# Altium PCB Break Board_Rev02.PcbDoc
Units mil, origin at the board's own origin, x right, y up, seen from the top; angles counter-clockwise.
Board outline 545 x 629.92 mil, 2 copper layers (Top Layer, Bottom Layer); 6 components, 5 nets, 24 pads, 22 vias.
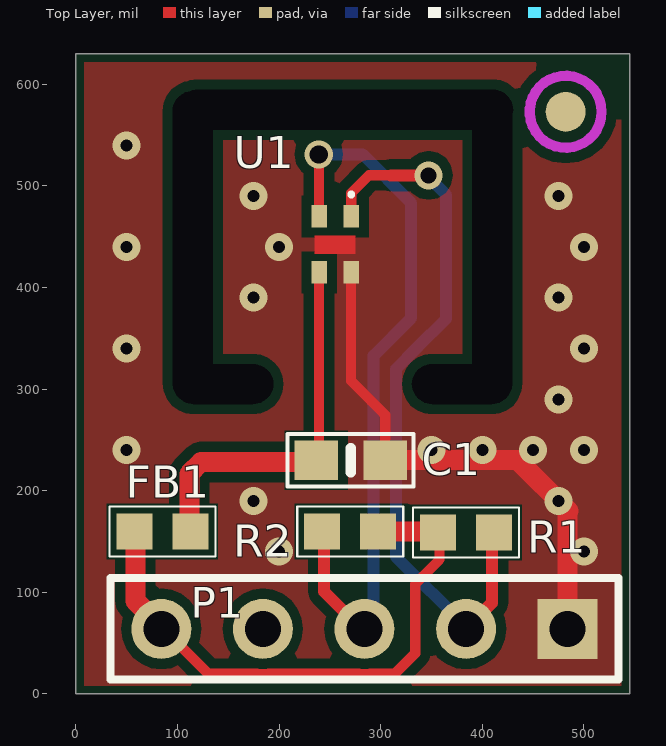
[diagram p0: Top Layer view]
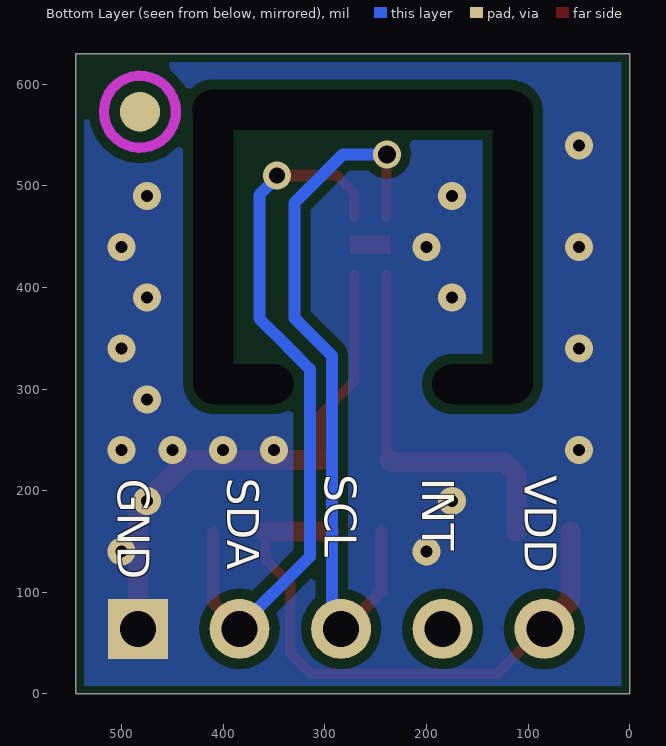
[diagram p1: Bottom Layer view, seen from below]

## Layer stack, top to bottom
Top Solder: solder mask 0.4, Solder Resist, Dk 3.5
Top Layer: signal copper 1.4
Dielectric 1: dielectric 12.6, FR-4, Dk 4.8
Bottom Layer: signal copper 1.4
Bottom Solder: solder mask 0.4, Solder Resist, Dk 3.5

## Board outline
0,0 0,629.92 545,629.92 545,0

## Design rules (kind name [scope] priority, off if disabled: settings)
BoardOutlineClearance [All] p1: gap=8 ignorepadtopadclearanceinfootprint=FALSE except(0: Arc-SplitContinuation Track-SplitContinuation SMDPad-SplitContinuation THPad-SplitContinuation Via-SplitContinuation Fill-SplitContinuation Poly-SplitContinuation Region-SplitContinuation Text-SplitContinuation)
Clearance [All] p1: gap=10 ignorepadtopadclearanceinfootprint=FALSE except(0: Arc-Hole Track-Hole SMDPad-Hole THPad-Hole Via-Hole Fill-Hole Poly-Hole Region-Hole Text-Hole)
PolygonConnect [All] p1: connectstyle=Direct reliefconductorwidth=10 reliefentries=4 polygonreliefangle="90 Angle" airgapwidth=10
RoutingVias [All] p1: holewidth=28 width=50 viastyle="Through Hole" minholewidth=28 minwidth=50 maxholewidth=28 maxwidth=50
SolderMaskExpansion [All] p1: expansion=4 istentingtop=FALSE
Width [All] p1: maxlimit=39.37 minlimit=10 preferedwidth=10
30 further rules are at their usual default settings.

## Classes and differential pairs
component class "Break Board_Rev02": C1 FB1 R1 R2 U1

## Components (designator, comment, footprint, x,y, rotation, side; value= is the part's Value field where it differs from the comment)
C1 "0.1uF" "0603 Capacitor" 270.47,230 r0 top
FB1 "FB 1uH" R0603 85,160 r180 top
P1 "Header 5" HDR1X5 484,64 r180 top
R1 "4.7K" R0603 384,159 r180 top
R2 "4.7K" R0603 270,160 r0 top
U1 "SHT41-AD1B-R3" SHT41AD1BR3 255.25,442.44 r270 top

## Footprints (in the part's own frame and the unit in brackets; to place one, negate y for a bottom-side part, rotate by r counter-clockwise, add the part's x,y. Pads: shape width x height; smd on the part's side, far side on the other; paste and mask are expansions set on the pad)
"0603 Capacitor" [mil]
  rect 43x39 smd: 1(-34,0) 2(34,0)
  silkscreen extent -62,-26 62,26, body extent -31,-16 32,16, height 32
HDR1X5 [mm] "Connector; Header; 5 Position"
  rect 1.5x1.5 hole 0.9: 1(0,0)
  round 1.5 hole 0.9: 2(2.54,0) 3(5.08,0) 4(7.62,0) 5(10.16,0)
  silkscreen extent -1.27,-1.27 11.43,1.27
R0603 [mm] "R0603"
  rect 0.9x0.9 smd: 1(-0.7,0) 2(0.7,0)
  silkscreen extent -1.33,-0.63 1.33,0.63, body extent -0.85,-0.4 0.85,0.4, height 0.56
SHT41AD1BR3 [mil]
  rect 22x15 smd: 1(-27.56,15.75) 2(-27.56,-15.75) 3(27.56,-15.75) 4(27.56,15.75)
  silkscreen extent -51,14 -47,18, body extent -30,-30 30,30, height 27

## Part data
C1: library part CAP, Part Number=1276-1011-2-ND
FB1: library part INDUCTOR, "FILTER CHIP 120 OHM 3A 0603", Distributor Part Number=MMZ2012Y152B, PACKAGE=0603, Part Number=490-3996-1-ND, Manufacturer Part Number=MMZ2012Y152B, Type=Ferrite
P1: "Header, 5-Pin", LatestRevisionDate=17-Jul-2002, LatestRevisionNote="Re-released for DXP Platform.", Publisher="Altium Limited"
R1 R2: library part R, PACKAGE=0603, Part Number=P4.7KDBTR-ND, Type=Resistor
U1: "Integrated Circuit", Manufacturer_Name=Sensirion, Mouser Part Number=403-SHT41-AD1B-R3, Arrow Part Number=SHT41-AD1B-R3, Arrow Price/Stock=https://www.arrow.com/en/products/sht41-ad1b-r3/sensirion-ag?region=nac, Datasheet Link=https://www.mouser.fr/datasheet/2/682/Sensirion_Humidity_Sensors_SHT4x_Datasheet-2001050.pdf, Height=0.59mm, Manufacturer_Part_Number=SHT41-AD1B-R3, Mouser Price/Stock=https://www.mouser.co.uk/ProductDetail/Sensirion/SHT41-AD1B-R3?qs=XAiT9M5g4x9TCtE5W6N3dA%3D%3D

## Free pads (board coordinates)
  rect 0x0 hole 39.37 slot 307.09 at 90 deg unplated: 24(115,440) 24(410,440)
  rect 0x0 hole 39.37 slot 98.43 at 0 deg unplated: 24(145,305) 24(380,305)
  rect 0x0 hole 39.37 slot 330.71 at 0 deg unplated: 24(265,575)
  round 39.37 smd: 24(482,573)
  round 39.37 smd far side: 24(482,573)

## Via types
v1: diameter 27.56, hole 11.81, Top Layer to Bottom Layer, tented both sides, 20 vias
v2: diameter 27.6, hole 17.75, Top Layer to Bottom Layer, tented both sides, 1 vias
v3: diameter 27.56, hole 15.75, Top Layer to Bottom Layer, tented both sides, 1 vias

## Nets (pads, with @x,y where several pads share a name; then routed paths per layer and width w, separated by ;. In a path a pad name is that pad's centre, name@x,y a point inside that pad or via, vN(x,y) a via of type N, cw(c..) or ccw(c..) an arc to the next point about the centre after c; other vN are vias at no path point)
GND_H: C1.2 P1.1 U1.4 | length 512.6
  Top Layer w10: U1.4@270.75,412.44 270.75,308.25 304.47,274.53 C1.2
  Top Layer w19.68: C1.2 435,230 485,180 ; P1.1 484,179
  other v1: 200,140 500,140 175,190 475,190 50,240 350,240 400,240 450,240 500,240 475,290 50,340 500,340 175,390 475,390 50,440 200,440 500,440 175,490 475,490 50,540
SCL_TH: P1.3 R2.1 U1.2 | length 723.6
  Top Layer w10: v2(239,531) 239.25,530.75 239.25,470.25 U1.2
  Top Layer w11.81: R2.1@244.41,160 244.41,100.59 280,65 P1.3@285,65
  Bottom Layer w11.81: v2(239,531) 282.18,531 330,483.18 330,370 293,333 293,73 P1.3@285,65
SDA_TH: P1.2 R1.1 U1.1 | length 714.5
  Top Layer w10: U1.1 271,493 288.44,510.44 310.13,510.44 ; v3(347.25,510.44) v3@347.56,510.44
  Top Layer w11.81: 310.13,510.44 v3(347.25,510.44) ; P1.2 409.59,89.59 R1.1@409.59,159
  Bottom Layer w11.81: v3(347.25,510.44) 347.25,508.3 364.41,491.14 364.41,369.41 335.59,340.59 335.59,340.45 314.81,319.67 314.81,135.19 P1.2@385,65
V3P3: FB1.2 P1.5 R1.2 R2.2 | length 576.5
  Top Layer w10: P1.5@85,65 130.16,19.84 178.31,19.84 ccw(c184,64) 189.69,19.84 278.31,19.84 ccw(c284,64) 289.69,19.84 313.84,19.84 334,40 334,108.25 357.89,132.14 357.89,158.48 R1.2@359.41,160
  Top Layer w19.68: FB1.2@58.43,160 58.43,91.57 P1.5@85,65 ; R2.2@295.59,160 R1.2@359.41,160
VDD: C1.1 FB1.1 U1.3 | length 370.7
  Top Layer w10: C1.1 239.25,232.78 U1.3@239.25,412.44
  Top Layer w19.68: FB1.1@111.57,160 111.57,216.7 123.11,228.23 234.7,228.23 C1.1
pads on no net: P1.4

## Polygon pours and split planes (outlines as drawn)
GND_H on Bottom Layer "GND_H_L02_P001" (solid, pour order 1): 0,0 545,0 545,629.92 0,629.92
GND_H on Top Layer "GND_H_L01_P000" (solid, pour order 0): 0,0 0,629.92 545,629.92 545,0

## Keep-outs
Keep-Out Layer:
  circle w10: c482,573 r35.43
  circle w10: c482,573 r35.43

## Other copper
Top Layer:
  region net GND_H: 275,451 235,451 235,433 275,433

## Silkscreen, mask and mechanical layers (free items; w line width, h text height)
Bottom Overlay:
  text "SCL" at 300,216 h31.5 r90
  text "VDD" at 103,215 h31.5 r90
  text "INT" at 204,213 h31.5 r90
  text "SDA" at 396,213 h31.5 r90
  text "GND" at 504,212 h31.5 r90
Top Solder:
  region: 275,451 235,451 235,433 275,433
Mechanical 1:
  the board outline again, w10
Drill Drawing:
  circle w10: c24.36,1214.78 r14.05
  lines w10: 10.3,912.62 38.41,912.62 24.36,884.51 10.3,912.62 ; 10.3,954.78 17.33,954.78 17.33,947.76 31.38,947.76 31.38,954.78 38.41,954.78 38.41,968.84 31.38,968.84 31.38,975.87 17.33,975.87 17.33,968.84 10.3,968.84 10.3,954.78 ; 10.3,1011 38.41,1011 38.41,1039.11 10.3,1039.11 10.3,1011 ; 10.3,1074.24 24.36,1081.27 38.41,1074.24 31.38,1088.3 38.41,1102.35 24.36,1095.32 10.3,1102.35 17.33,1088.3 10.3,1074.24 ; 10.3,1137.49 10.3,1144.51 17.33,1151.54 10.3,1158.57 10.3,1165.59 17.33,1165.59 24.36,1158.57 31.38,1165.59 38.41,1165.59 38.41,1158.57 31.38,1151.54 38.41,1144.51 38.41,1137.49 31.38,1137.49 24.36,1144.51 17.33,1137.49 10.3,1137.49
  lines w15: -16.72,865.54 3094.54,865.54 ; -16.72,1245 3094.54,1245 ; 234.05,802.3 234.05,1308.24 ; 469.02,802.3 469.02,1308.24 ; 944.23,802.3 944.23,1308.24 ; 1176.03,802.3 1176.03,1308.24 ; 1503.92,802.3 1503.92,1308.24 ; 2147.72,802.3 2147.72,1308.24 ; 2414.92,802.3 2414.92,1308.24 ; 2747.87,802.3 2747.87,1308.24 ; -16.72,802.3 3094.54,802.3 3094.54,1308.24 -16.72,1308.24 -16.72,802.3
  text "Symbol" at 21.23,1263.97 h30.36
  text "Count" at 253.02,1263.97 h30.36
  text "Hole Size" at 487.99,1263.97 h30.36
  text "Plated" at 963.21,1263.97 h30.36
  text "Hole Type" at 1195,1263.97 h30.36
  text "Drill Layer Pair" at 1522.89,1263.97 h30.36
  text "Via/Pad" at 2166.7,1263.97 h30.36
  text "Pad Shape" at 2433.9,1263.97 h30.36
  text "Template" at 2766.85,1263.97 h30.36
  text "1" at 253.02,1200.73 h25.3
  text "0.400mm (15.75mil)" at 487.99,1200.73 h25.3
  text "PTH" at 963.21,1200.73 h25.3
  text "Round" at 1195,1200.73 h25.3
  text "Top Layer - Bottom Layer" at 1522.89,1200.73 h25.3
  text "Via" at 2166.7,1200.73 h25.3
  text "Rounded" at 2433.9,1200.73 h25.3
  text "v70h40m0mx0" at 2766.85,1200.73 h25.3
  text "1" at 253.02,1137.49 h25.3
  text "0.451mm (17.75mil)" at 487.99,1137.49 h25.3
  text "PTH" at 963.21,1137.49 h25.3
  text "Round" at 1195,1137.49 h25.3
  text "Top Layer - Bottom Layer" at 1522.89,1137.49 h25.3
  text "Via" at 2166.7,1137.49 h25.3
  text "Rounded" at 2433.9,1137.49 h25.3
  text "v70h45m0mx0" at 2766.85,1137.49 h25.3
  text "1" at 253.02,1074.24 h25.3
  text "1.000mm (39.37mil)" at 487.99,1074.24 h25.3
  text "NPTH" at 963.21,1074.24 h25.3
  text "Slot" at 1195,1074.24 h25.3
  text "Top Layer - Bottom Layer" at 1522.89,1074.24 h25.3
  text "Pad" at 2166.7,1074.24 h25.3
  text "Rectangle" at 2433.9,1074.24 h25.3
  text "s0hn100_840" at 2766.85,1074.24 h25.3
  text "2" at 253.02,1011 h25.3
  text "1.000mm (39.37mil)" at 487.99,1011 h25.3
  text "NPTH" at 963.21,1011 h25.3
  text "Slot" at 1195,1011 h25.3
  text "Top Layer - Bottom Layer" at 1522.89,1011 h25.3
  text "Pad" at 2166.7,1011 h25.3
  text "Rectangle" at 2433.9,1011 h25.3
  text "s0hn100_250" at 2766.85,1011 h25.3
  text "2" at 253.02,947.76 h25.3
  text "1.000mm (39.37mil)" at 487.99,947.76 h25.3
  text "NPTH" at 963.21,947.76 h25.3
  text "Slot" at 1195,947.76 h25.3
  text "Top Layer - Bottom Layer" at 1522.89,947.76 h25.3
  text "Pad" at 2166.7,947.76 h25.3
  text "Rectangle" at 2433.9,947.76 h25.3
  text "s0hn100_780" at 2766.85,947.76 h25.3
  text "5" at 253.02,884.51 h25.3
  text "0.900mm (35.43mil)" at 487.99,884.51 h25.3
  text "PTH" at 963.21,884.51 h25.3
  text "Round" at 1195,884.51 h25.3
  text "Top Layer - Bottom Layer" at 1522.89,884.51 h25.3
  text "Pad" at 2166.7,884.51 h25.3
  text "(Mixed)" at 2433.9,884.51 h25.3
  text "(Mixed)" at 2766.85,884.51 h25.3
  text "12 Total" at 253.02,821.27 h25.3
  text "Slot definitions :" at 21.23,748.58 h25.3
  text "Routed Path Length" at 472.83,748.58 h25.3
  text "= Calculated from tool start centre position to tool end centre position." at 953.92,748.58 h25.3
  text "Hole Length" at 472.83,694.86 h25.3
  text "= Routed Path Length + Tool Size = Slot length as defined in the PCB layout" at 781.12,694.86 h25.3